# Altium PCB PCB-filter.PcbDoc
Units mil, origin at the board's own origin, x right, y up, seen from the top; angles counter-clockwise.
Board outline 6000 x 4000 mil, 2 copper layers (Top Layer, Bottom Layer); 38 components, 28 nets, 109 pads, 2 vias.
Unrouted connection lines stored in the file: 1.
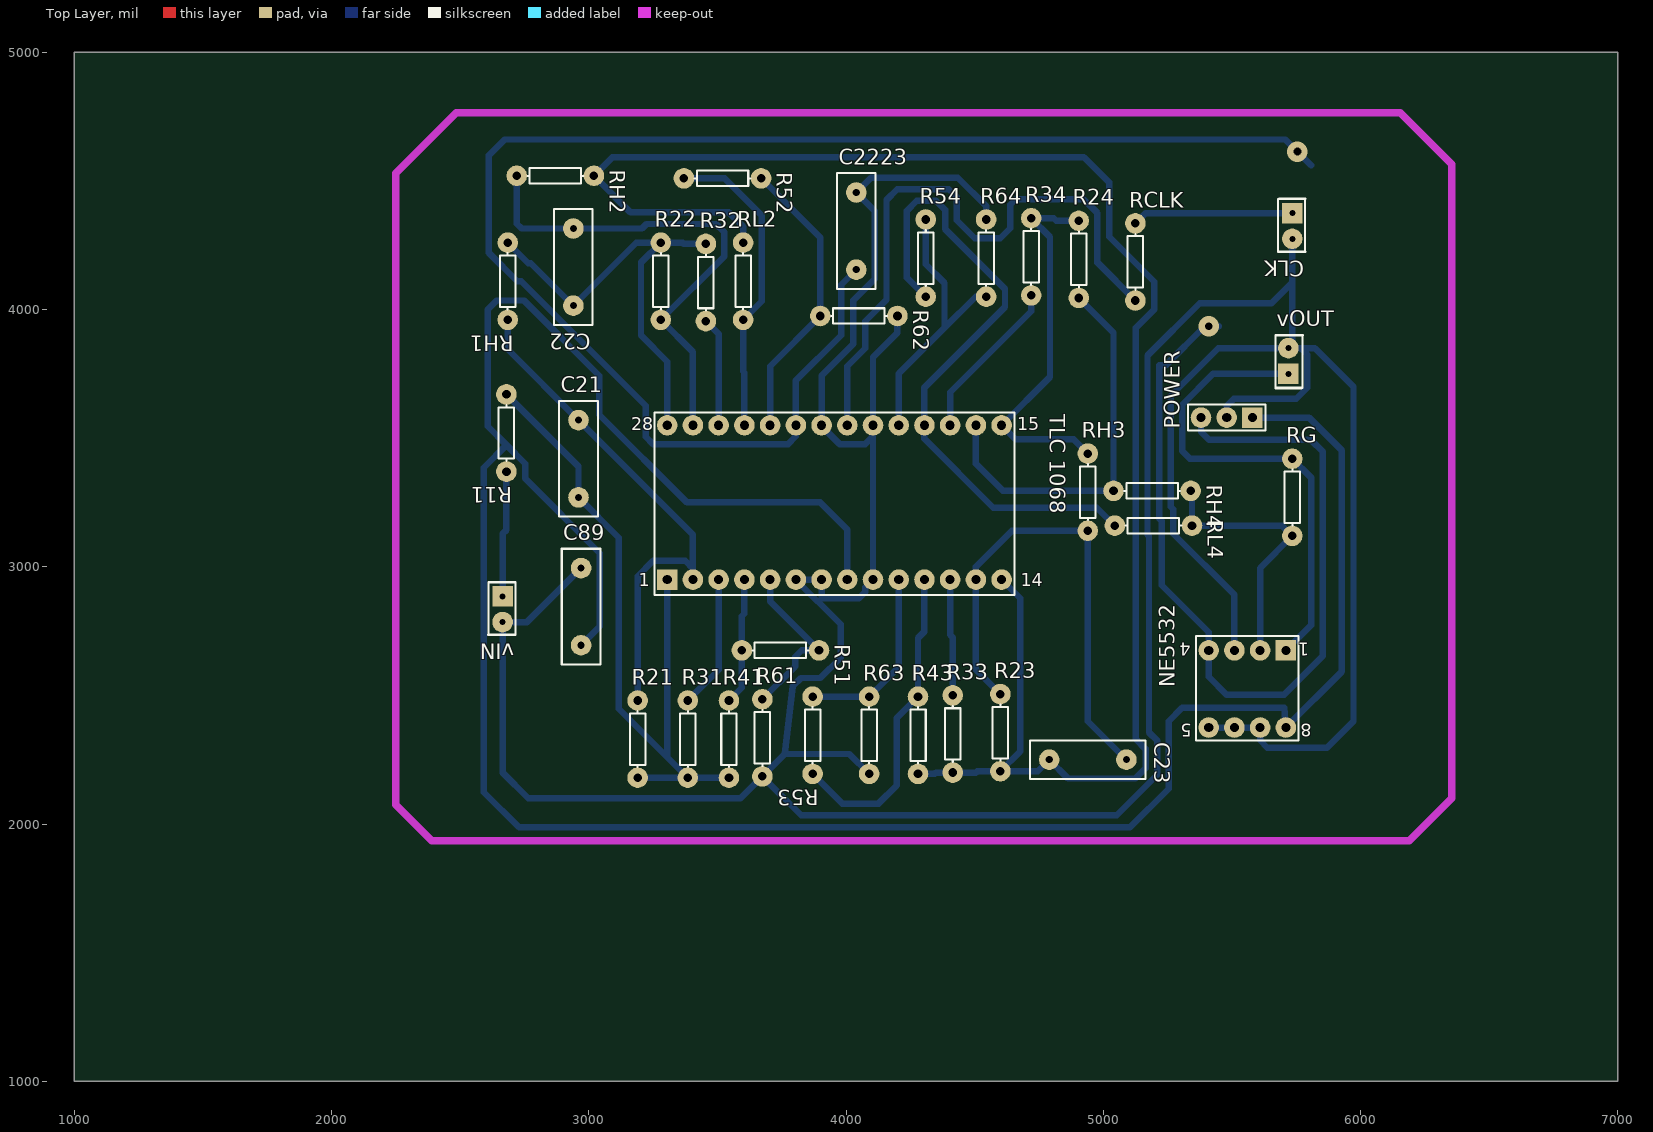
[diagram p0: Top Layer view]
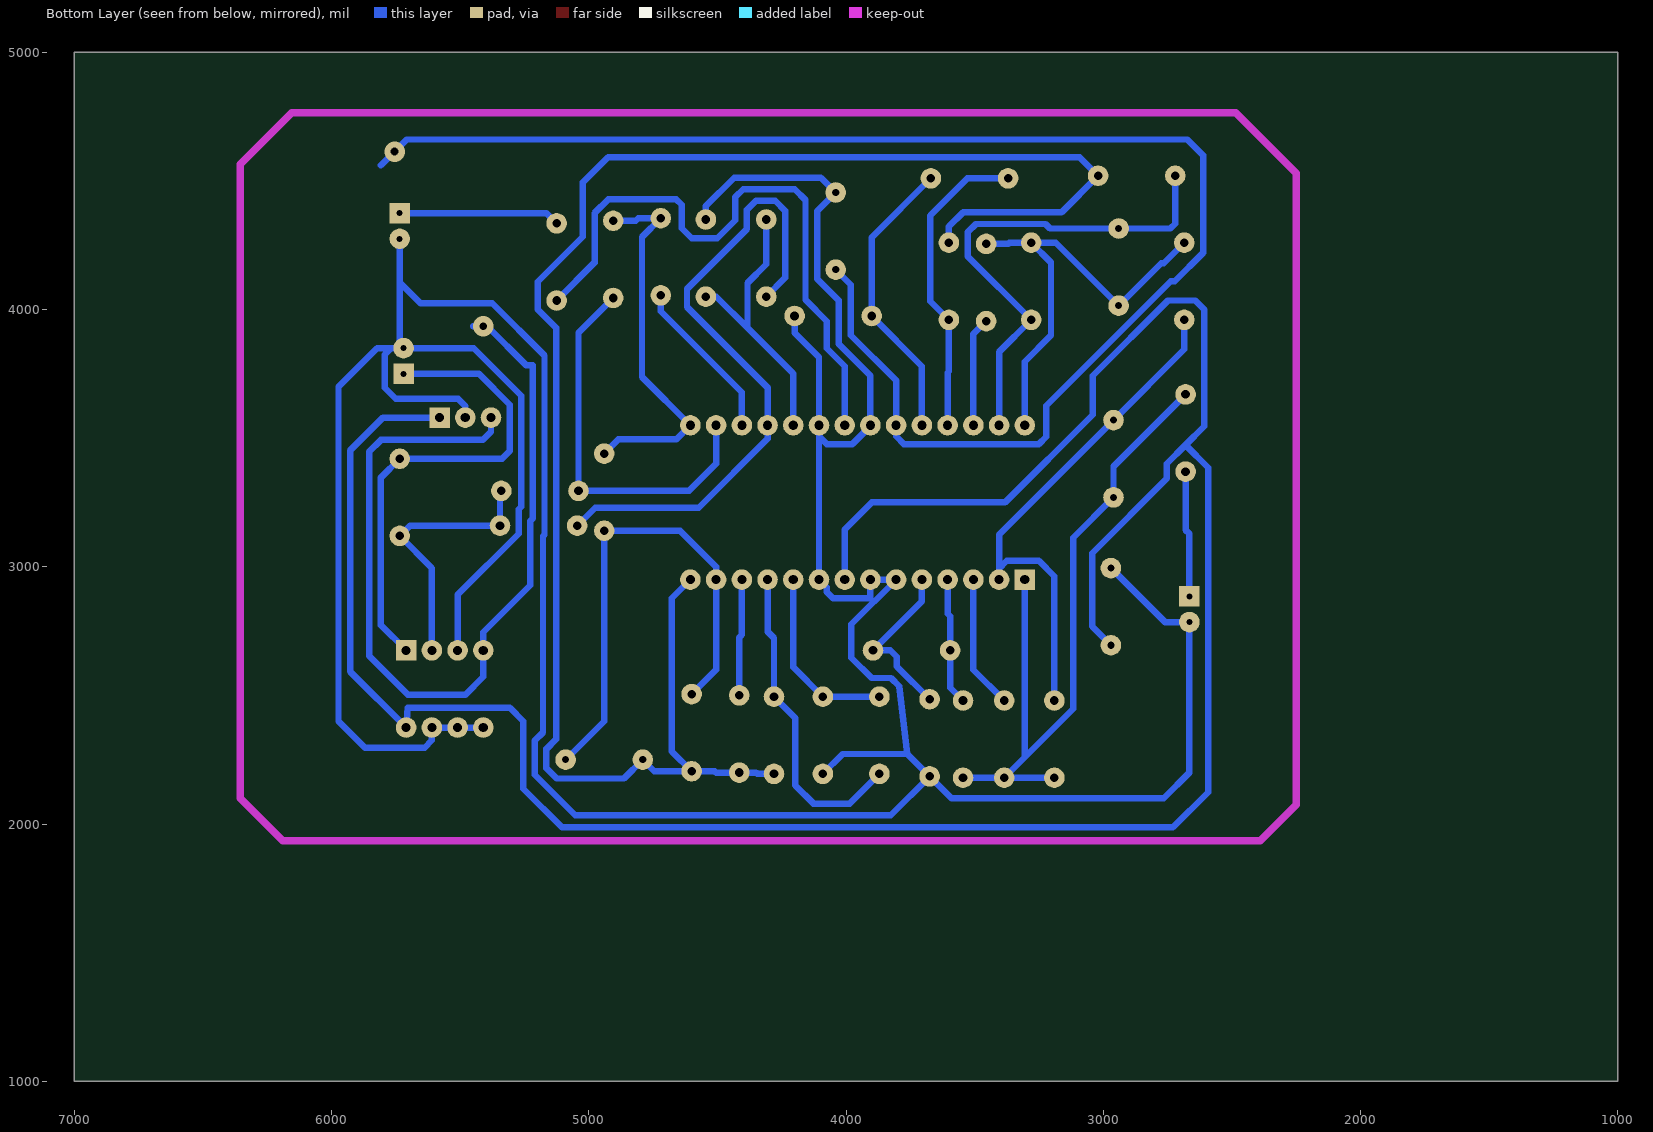
[diagram p1: Bottom Layer view, seen from below]

## Layer stack, top to bottom
Top Layer: signal copper 1.4
Dielectric: dielectric 12.6, FR-4, Dk 4.8
Bottom Layer: signal copper 1.4

## Board outline
1000,1000 7000,1000 7000,5000 1000,5000

## Design rules (kind name [scope] priority, off if disabled: settings)
Clearance [All] p1: gap=20
ComponentClearance [All] p1: gap=10 collisioncheckmode=3 verticalgap=10 showdistances=TRUE
PolygonConnect [All] p1: connectstyle=Relief reliefconductorwidth=10 reliefentries=4 polygonreliefangle="90 Angle" airgapwidth=10
RoutingLayers [All] p1: top layer_v5=FALSE bottom layer_v5=TRUE
RoutingVias [All] p1: holewidth=28 width=50 viastyle="Through Hole" minholewidth=28 minwidth=50 maxholewidth=28 maxwidth=50
SolderMaskExpansion [All] p1: expansion=4
Width [All] p1: maxlimit=25 minlimit=25 preferedwidth=25
26 further rules are at their usual default settings.

## Components (designator, comment, footprint, x,y, rotation, side; value= is the part's Value field where it differs from the comment)
C21 "Cap" RAD-0.3 2960,3420 r90 top
C22 "Cap" RAD-0.3 2940,4165 r270 top
C23 "Cap" RAD-0.3 4940,2250 r0 top
C89 "Cap" RAD-0.3 2970,2845 r90 top
C2223 "Cap" RAD-0.3 4040,4305 r90 top
CLK "Header 2" J2 5735,4375 r270 top
NE5532 "Header 4X2A" J8 5710,2675 r180 top
POWER "Header 3H" J3 5580,3580 r180 top
R11 "Res1" AXIAL-0.3 2680,3520 r270 top
R21 "Res1" AXIAL-0.3 3190,2330 r90 top
R22 "Res1" AXIAL-0.3 3280,4110 r90 top
R23 "Res1" AXIAL-0.3 4600,2355 r90 top
R24 "Res1" AXIAL-0.3 4905,4195 r90 top
R31 "Res1" AXIAL-0.3 3385,2330 r90 top
R32 "Res1" AXIAL-0.3 3455,4105 r90 top
R33 "Res1" AXIAL-0.3 4415,2350 r90 top
R34 "Res1" AXIAL-0.3 4720,4205 r90 top
R41 "Res1" AXIAL-0.3 3545,2330 r90 top
R43 "Res1" AXIAL-0.3 4280,2345 r90 top
R51 "Res1" AXIAL-0.3 3745,2675 r0 top
R52 "Res1" AXIAL-0.3 3520,4510 r0 top
R53 "Res1" AXIAL-0.3 3870,2345 r270 top
R54 "Res1" AXIAL-0.3 4310,4200 r90 top
R61 "Res1" AXIAL-0.3 3675,2335 r90 top
R62 "Res1" AXIAL-0.3 4050,3975 r0 top
R63 "Res1" AXIAL-0.3 4090,2345 r90 top
R64 "Res1" AXIAL-0.3 4545,4200 r90 top
RCLK "RCLK" AXIAL-0.3 5125,4185 r90 top
RG "Res3" AXIAL-0.3 5735,3270 r90 top
RH1 "Res1" AXIAL-0.3 2685,4110 r270 top
RH2 "Res1" AXIAL-0.3 2870,4520 r0 top
RH3 "Res1" AXIAL-0.3 4940,3290 r90 top
RH4 "Res3" AXIAL-0.3 5190,3295 r0 top
RL2 "Res1" AXIAL-0.3 3600,4110 r90 top
RL4 "Res3" AXIAL-0.3 5195,3160 r0 top
"TLC 1068" "Header 14X2A" J28 3305,3450 r0 top
vIN "MHDR1X2" J2 2665,2885 r270 top
vOUT "MHDR1X2" J2 5720,3750 r90 top

## Footprints (in the part's own frame and the unit in brackets; to place one, negate y for a bottom-side part, rotate by r counter-clockwise, add the part's x,y. Pads: shape width x height; smd on the part's side, far side on the other; paste and mask are expansions set on the pad)
AXIAL-0.3 [mil] "Axial Device, Thru-Hole; 2 Leads; 0.3 in Pin Spacing"
  round 80 hole 33.46: 1(-150,0) 2(150,0)
  silkscreen extent -109,-30 109,30
J2 [mil]
  rect 80x80 hole 23.62: 1(0,0)
  round 80 hole 23.62: 2(100,0)
  silkscreen extent -55,-55 150,50
J3 [mil]
  rect 80x80 hole 35.43: 1(0,0)
  round 80 hole 35.43: 2(100,0) 3(200,0)
  silkscreen extent -50,-50 250,50
J8 [mil]
  rect 80x80 hole 35.43: 1(0,0)
  round 80 hole 35.43: 2(100,0) 3(200,0) 4(300,0) 5(0,300) 6(100,300) 7(200,300) 8(300,300)
  silkscreen extent -50,-55 350,350
J28 [mil]
  rect 80x80 hole 35.43: 1(0,-500)
  round 80 hole 35.43: 2(100,-500) 3(200,-500) 4(300,-500) 5(400,-500) 6(500,-500) 7(600,-500) 8(700,-500) 9(800,-500) 10(900,-500) 11(1000,-500) 12(1100,-500) 13(1200,-500) 14(1300,-500) 15(0,100) 16(100,100) 17(200,100) 18(300,100) 19(400,100) 20(500,100) 21(600,100) 22(700,100) 23(800,100) 24(900,100) 25(1000,100) 26(1100,100) 27(1200,100) 28(1300,100)
  silkscreen extent -50,-560 1350,150
RAD-0.3 [mil] "Radial Cap, Thru-Hole; 2 Leads; 0.3 in Pin Spacing"
  round 80 hole 27.56: 1(-150,0) 2(150,0)
  silkscreen extent -225,-75 225,75

## Part data
C21 C22 C23 C89 C2223: "Capacitor"
CLK vIN vOUT: "Header, 2-Pin"
NE5532: "Header, 4-Pin, Dual row"
POWER: "Header, 3-Pin, Right Angle"
R11 R21 R22 R23 R24 R31 R32 R33 R34 R41 R43 R51 R52 R53 R54 R61 R62 R63 R64 RG RH1 RH2 RH3 RH4 RL2 RL4: "Resistor"
RCLK: library part Res3, "Resistor"
"TLC 1068": "Header, 14-Pin, Dual row"

## Via types
v1: diameter 80, hole 30, Top Layer to Bottom Layer, 2 vias

## Nets (pads, with @x,y where several pads share a name; then routed paths per layer and width w, separated by ;. In a path a pad name is that pad's centre, name@x,y a point inside that pad or via, vN(x,y) a via of type N, cw(c..) or ccw(c..) an arc to the next point about the centre after c; other vN are vias at no path point)
NetC21_1: "TLC 1068.1" C21.1 R11.1 R21.1 R31.1 R41.1 | length 2827
  Bottom Layer w25: R11.1 2960,3390 C21.1 3117,3113 3117,2448 3305,2260 ; R21.1 R31.1 ; 3305,2950 3305,2260 ; R41.1 R31.1 ; 3305,2260 R31.1
NetC21_2: "TLC 1068.2" C21.2 R21.2 RH1.2 | length 2043.5
  Bottom Layer w25: RH1.2 2685,3845 C21.2 3405,3125 3405,2993 ; R21.2 3190,2963 3250,3023 3375,3023 3405,2993 ; 3405,2950 3405,2993
NetC22_1: "TLC 1068.16" C22.1 R22.1 RH2.1 | length 1926.4
  Bottom Layer w25: RH2.1 2720,4334 2739,4315 C22.1 3207,4315 3224.5,4332.5 3495,4332.5 3527.5,4300 3527.5,4207.5 R22.1 3405,3835 3405,3550
NetC22_2: "TLC 1068.15" C22.2 R22.2 R32.2 RH1.1 | length 1759.2
  Bottom Layer w25: RH1.1 2764.95,4180.05 2774.95,4180.05 C22.2 3185,4260 R22.2 ; 3305,3550 3305,3797.52 3203,3899.52 3203,4183 R22.2 ; R32.2 3370,4255 3365,4260 R22.2
NetC23_1: "TLC 1068.14" C23.1 R23.1 R33.1 R43.1 RH2.2 RL2.2 | length 6953.3
  Bottom Layer w25: RL2.2 3600,4322.5 3545,4377.5 3162.5,4377.5 RH2.2 3092,4592 4925,4592 5023,4494 5023,4283 5198,4108 5198,4000 5127,3929 5127,2329.35 5164.5,2291.85 5164.5,2216.5 5125,2177 4863,2177 C23.1 4745,2205 R23.1 ; R43.1 4345,2195 4350,2200 R33.1 4505,2200 4510,2205 R23.1 ; 4605,2950 4677,2878 4677,2282 R23.1
NetC23_2: "TLC 1068.13" C23.2 R23.2 RH3.1 | length 1979.5
  Bottom Layer w25: R23.2 4505,2600 4505,2950 4505,3000 4645,3140 RH3.1 4940,2400 C23.2
NetC89_1: "TLC 1068.8" C89.1 NE5532.5 POWER.1 | length 10125.9
  Bottom Layer w25: C89.1 3043,2768 3043,3053 2753,3343 2753,3400 2680,3473 ; 4005,2950 4005,3145 3900,3250 3382,3250 3041,3591 3041,3742.36 2748.36,4035 2642,4035 2607,4000 2607,3546 2680,3473 ; POWER.1 5800,3580 5928,3452 5928,2593 NE5532.5 5703,2452 5306.5,2452 5254.5,2400 5254.5,2137.5 5104,1987 2729,1987 2592,2124 2592,3385 2680,3473
NetC89_2: "TLC 1068.6" "TLC 1068.7" "TLC 1068.9" "TLC 1068.21" "TLC 1068.23" C89.2 C2223.2 CLK.2 NE5532.3 NE5532.6 NE5532.7 NE5532.8 POWER.2 R61.1 R62.2 R63.1 R64.2 vIN.2 vOUT.2 | length 15670.5
  Bottom Layer w25: C89.2 2760,2785 vIN.2 2665,2200 2765,2100 3590,2100 R61.1 ; R63.1 4013,2272 3762,2272 ; R62.2 4200,3910 4105,3815 4105,3550 4105,3507 ; R64.2 4545,4402.5 4435,4512.5 4097.5,4512.5 C2223.2 4112.5,4382.5 4112.5,4120 4029,4036.5 4029,3867 3905,3743 3905,3550 3932,3523 3932,3520 3975,3477 4075,3477 4105,3507 ; NE5532.8 NE5532.7 NE5532.6 5610,2325 5638,2297 5870,2297 5973,2400 5973,3700 5823,3850 5768,3850 ; POWER.2 5480,3625 5508,3653 5750,3653 5793,3696 5793,3825 5768,3850 ; NE5532.3 5510,2891 5272.5,3128.5 5272.5,3223 5262,3233.5 5262,3665 5447,3850 vOUT.2 ; CLK.2 5735,4105 ; R61.1 3762,2272 ; R61.1 3826,2034 5052,2034 5209.5,2191.5 5209.5,2324.5 5178,2356 5178,3119 5172,3125 5172,3821 5375,4024 5654,4024 5735,4105 ; 3762,2272 3793,2535.5 3825,2567.5 3900,2567.5 3979,2646.5 3979,2776 3805,2950 3905,2950 3905,2877 4050,2877 4075,2902 4075,2920 4105,2950 4105,3507 ; vOUT.2 5735,3865 5735,4105 ; vOUT.2 5768,3850
NetC2223_1: "TLC 1068.20" C2223.1 NE5532.4 POWER.3 | length 9447.5
  Bottom Layer w25: C2223.1 3981,4096 3981,3900 3805,3724 3805,3550 3805,3507 3775,3477 3250,3477 3221,3506 3221,3626 2737,4110 2722,4110 2612,4220 2612,4600 2673,4661 5708,4661 5808,4561 ; POWER.3 5380,3525 5412,3493 5808,3493 5853,3448 5853,2653 5703,2503 5479.1,2503 5410,2572.1 NE5532.4 5410,2746 5227.5,2928.5 5227.5,3178 5217,3188.5 5217,3784 5244,3784 5395,3935 5450,3935
  other v1: 5410,3935 5755,4614
NetCLK_1: CLK.1 RCLK.2 | length 626.6
  Bottom Layer w25: RCLK.2 5165,4375 CLK.1
NetNE5532_1: NE5532.1 RG.2 vOUT.1 | length 1899.2
  Bottom Layer w25: NE5532.1 5808,2773 5808,3347 RG.2 5337,3420 5307,3450 5307,3630.33 5426.67,3750 vOUT.1
NetNE5532_2: NE5532.2 RG.1 RH4.2 RL4.2 | length 1040.4
  Bottom Layer w25: RH4.2 5345,3290 RL4.2 5695,3160 RG.1 5610,2995 NE5532.2
NetR11_2: R11.2 vIN.1 | length 491.2
  Bottom Layer w25: vIN.1 2665,3128 2680,3143 R11.2
NetR24_1: "TLC 1068.27" R24.1 RH4.1 | length 1534.4
  Bottom Layer w25: 4505,3550 4505,3400 4610,3295 RH4.1 5040,3910 R24.1
NetR24_2: "TLC 1068.28" R24.2 R34.2 RH3.2 | length 1482.8
  Bottom Layer w25: R24.2 4817,4345 4807,4355 R34.2 4793,4282 4793,3738 4605,3550 4660,3495 4885,3495 RH3.2
NetR31_2: "TLC 1068.3" R31.2 | length 519.7
  Bottom Layer w25: R31.2 3505,2600 3505,2950
NetR32_1: "TLC 1068.17" R32.1 | length 425.7
  Bottom Layer w25: R32.1 3505,3905 3505,3550
NetR33_2: "TLC 1068.12" R33.2 | length 454.1
  Bottom Layer w25: 4405,2950 4405,2735 4415,2725 R33.2
NetR34_1: "TLC 1068.26" R34.1 | length 635.5
  Bottom Layer w25: 4405,3550 4405,3678 4720,3993 R34.1
NetR41_2: "TLC 1068.4" R41.2 R51.1 | length 494.9
  Bottom Layer w25: R41.2 3595,2530 R51.1 3595,2807 3605,2817 3605,2950
NetR43_2: "TLC 1068.11" R43.2 R53.2 | length 1248.8
  Bottom Layer w25: R53.2 3985.5,2079.5 4126.5,2079.5 4197,2150 4197,2412 R43.2 4280,2723 4305,2748 4305,2950
NetR51_2: "TLC 1068.5" R51.2 R61.2 | length 674.4
  Bottom Layer w25: R61.2 3802.5,2612.5 3802.5,2650 3827.5,2675 R51.2 3705,2865 3705,2950
NetR52_1: "TLC 1068.18" R52.1 RL2.1 | length 1209.8
  Bottom Layer w25: R52.1 3527.82,4510 3672.5,4365.32 3672.5,4032.5 RL2.1 3600,3760 3605,3755 3605,3550
NetR52_2: "TLC 1068.19" R52.2 R62.1 | length 1136
  Bottom Layer w25: R52.2 3900,4280 R62.1 3705,3780 3705,3550
NetR53_1: "TLC 1068.10" R53.1 R63.2 | length 722.6
  Bottom Layer w25: R53.1 R63.2 4205,2610 4205,2950
NetR54_1: "TLC 1068.25" R54.1 RL4.1 | length 2538.6
  Bottom Layer w25: R54.1 4237,4123 4237,4384.5 4275,4422.5 4350,4422.5 4385,4387.5 4385,4313 4618,4080 4618,4010 4305,3697 4305,3550 4305,3498 4573,3230 4975,3230 RL4.1
NetR54_2: "TLC 1068.24" R54.2 R64.1 | length 1116.1
  Bottom Layer w25: 4205,3550 4205,3751 4383,3929 ; R54.2 4310,4176 4383,4103 4383,3929 ; R64.1 4504,4050 4383,3929
NetRCLK_1: "TLC 1068.22" RCLK.1 | length 2447
  Bottom Layer w25: 4005,3550 4005,3779 4075,3849 4075,3955 4157.5,4037.5 4157.5,4426 4199,4467.5 4400,4467.5 4430,4437.5 4430,4347 4500,4277 4600,4277 4639,4316 4639,4406.74 4660.17,4427.92 4924.62,4427.92 4977.5,4375.03 4977.5,4182.5 RCLK.1

## Keep-outs
Keep-Out Layer:
  lines w30: 2250,2075 2250,4530 2485,4765 6155,4765 6355,4565 6355,2100 6190,1935 2390,1935 2250,2075

## Text inside footprints (layer, text, board x,y; h text height)
NE5532: Top Overlay "5" at 5345,2390 h50 r180; Top Overlay "1" at 5800,2705 h50 r180; Top Overlay "4" at 5340,2705 h50 r180; Top Overlay "8" at 5810,2390 h50 r180
"TLC 1068": Top Overlay "15" at 4665,3530 h50; Top Overlay "14" at 4680,2925 h50; Top Overlay "1" at 3195,2925 h50; Top Overlay "28" at 3165,3530 h50